# Altium PCB HAB-Communications-Board.PcbDoc (part 2 of 2)
Units mil, origin at the board's own origin, x right, y up, seen from the top; angles counter-clockwise.
Board outline 3937.01 x 3937.01 mil, 4 copper layers (Top Layer, Layer 1, Layer 2, Bottom Layer), stack 60.708 mil thick; 68 components, 59 nets, 326 pads, 208 vias.
Unrouted connection lines stored in the file: 48.
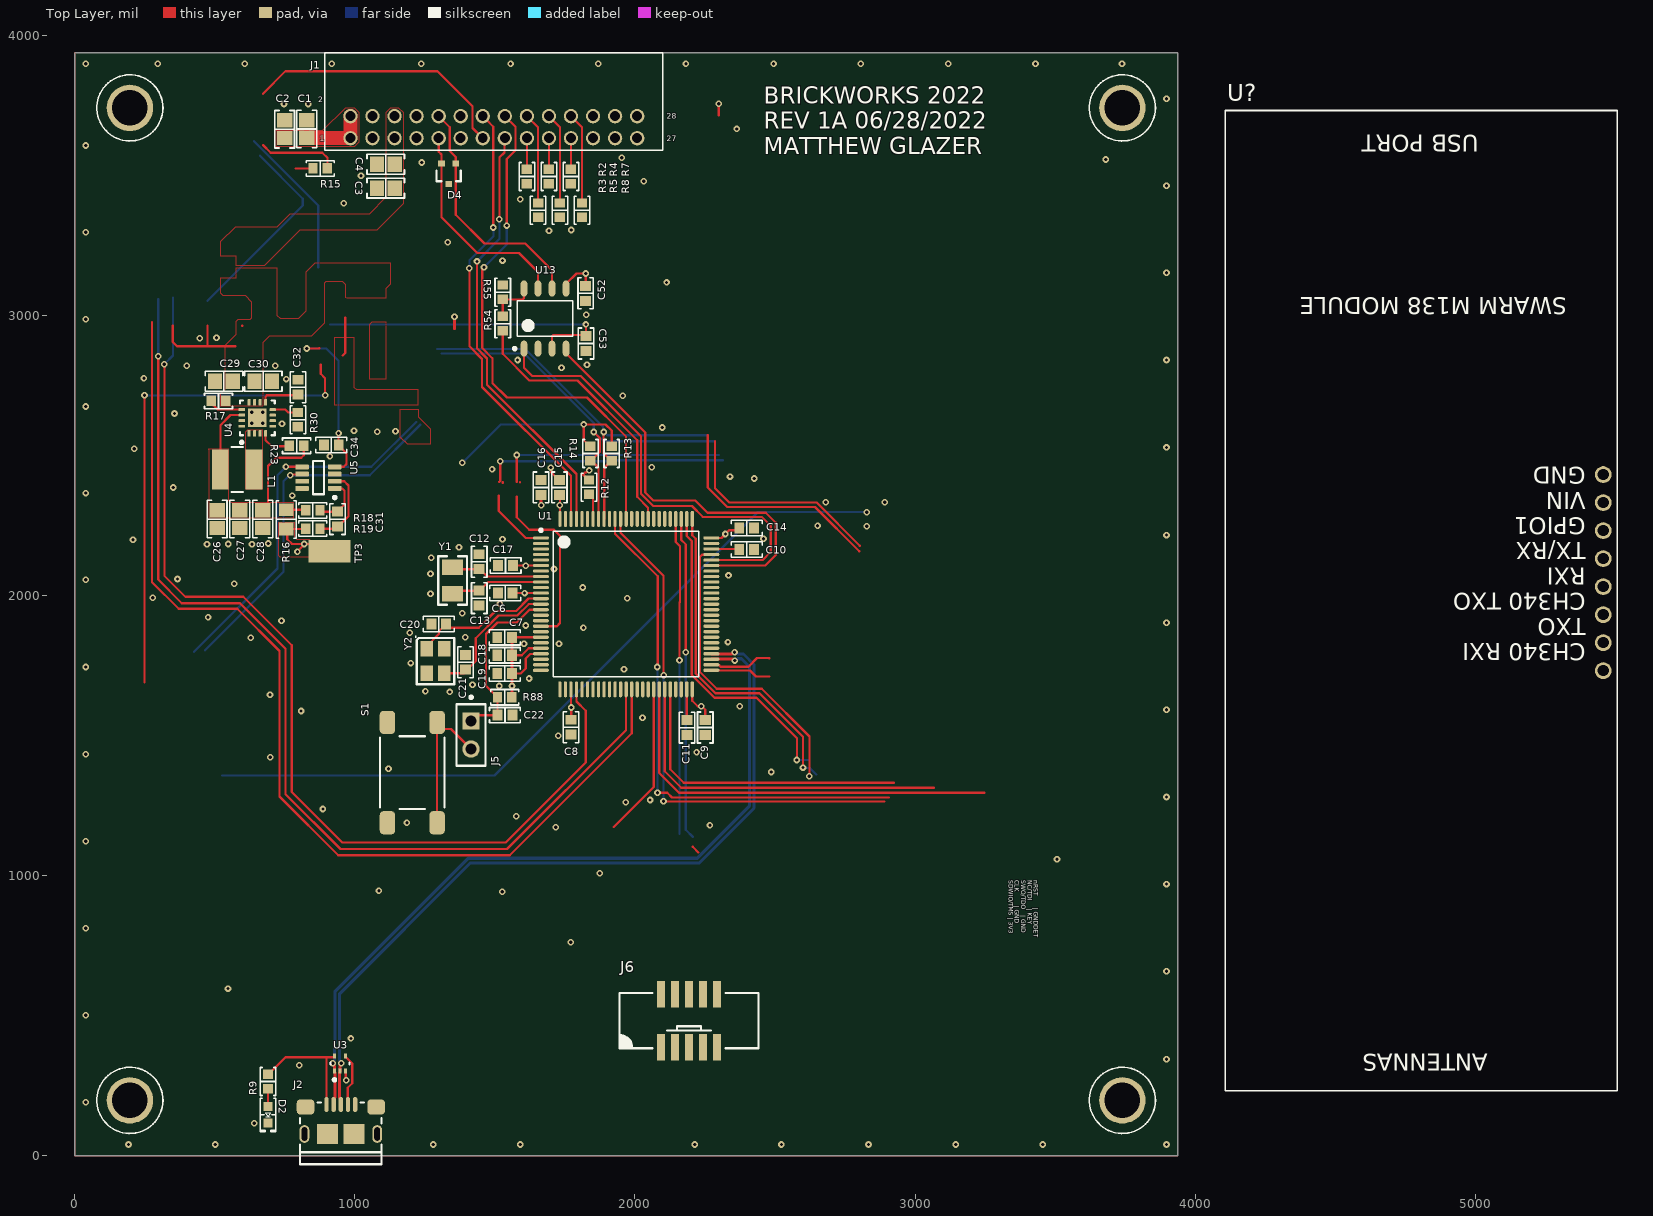
[diagram p0: Top Layer view]

## Via types
v1: diameter 23.62, hole 11.81, Top Layer to Bottom Layer, 208 vias

## Nets (pads, with @x,y where several pads share a name; then routed paths per layer and width w, separated by ;. In a path a pad name is that pad's centre, name@x,y a point inside that pad or via, vN(x,y) a via of type N, cw(c..) or ccw(c..) an arc to the next point about the centre after c; other vN are vias at no path point) (continued)
GND: (continued)
  other v1: 192,39.37 502,39.37 1280,39.37 1591,39.37 2213,39.37 2523,39.37 2834,39.37 3145,39.37 3456,39.37 3897.64,39.37 641,115 39.37,190 801,322 3897.64,344 986,418 39.37,501 547,596 3897.64,658 39.37,811 1526,942 1086,945 3897.64,969 1874,1008 3507,1058 39.37,1122 1717,1172 2267.75,1179.33 1186,1188 1576,1211 886,1237 1967,1261 2054,1269 3897.64,1280 2487,1369 1120,1381 698,1422 39.37,1433 2220,1440 1726,1499 2027,1563 808,1587 3897.64,1591 2374,1604 697,1645 1339,1655 1252,1657 1516,1676 1420,1681 1622,1703 1961,1736 39.37,1744 1200,1758 1604,1827 1729,1827 2332,1833 628,1848 1394,1850 1196,1866 1816,1884 1610,1892 3897.64,1902 738,1909 476,1922 1384,1936 1518,1970 1973,1990 279,1991 1270,2006 1814,2028 570,2041 39.37,2055 367,2058 2334,2071 1270,2077 1711,2094 1273,2134 1372,2172 472,2182 633,2182 548,2183 691,2185 208,2198 1527,2200 2459,2202 3897.64,2215 2828,2247 2652,2248 2681,2332.19 2892,2332.19 777,2356 39.37,2365 352,2385 1490,2450 2060,2457 911,2496 212,2523 3897.64,2528 1080,2584 1145,2586 997,2587 2097,2599 740,2612 632.2,2613.76 671.57,2613.76 356,2649 632.2,2653.13 671.57,2653.13 39.37,2674 1956,2712 755,2772 247,2775 1738,2812 716,2819 400,2820 1829,2823 1581,2840 3897.64,2840 446,2918 506,2919 39.37,2985 1826,3002 2113,3117 3897.64,3151 1527,3195 1332,3260 39.37,3296 1693,3301 1773,3304 960,3400 1590,3414 3897.64,3462 2031,3478 1022,3498 1239,3545 3681,3556 1953,3562 39.37,3606 2363,3665 747,3754 834,3754 3897.64,3773 39.37,3897.64 296,3897.64 607,3897.64 918,3897.64 1237,3897.64 1556,3897.64 1869,3897.64 2182,3897.64 2495,3897.64 2806,3897.64 3119,3897.64 3430,3897.64 3739,3897.64
NetC10_2: C10.2 U1.73 | length 110.9
  Top Layer w8: U1.73 2381.65,2165.35 C10.2@2383,2164
NetC11_2: C11.2 U1.49 | length 110.6
  Top Layer w8: U1.49 2185.04,1555.11 C11.2
NetC12_2: C12.2 U1.8 Y1.1 | length 329.2
  Top Layer w8: Y1.1 1355.94,2093.43 C12.2 1445.97,2093.43 1472.46,2066.93 U1.8
NetC13_2: C13.2 U1.9 Y1.2 | length 332.5
  Top Layer w8: Y1.2 1359.77,2016.57 C13.2 1445.97,2016.57 1476.64,2047.24 U1.9
NetC20_2: C20.2 U1.12 Y2.1 | length 505.5
  Top Layer w8: Y2.1 1256.35,1818.35 1300,1862 1300,1871.85 C20.2 1340.15,1884 1442,1884 1502,1944 1576,1944 1620.19,1988.19 U1.12
NetC21_2: C21.2 U1.13 Y2.3 | length 495.2
  Top Layer w8: Y2.3 1388.98,1721.98 1432,1765 1432,1847 1513,1928 1580,1928 1620.5,1968.5 U1.13
NetC22_2: C22.2 J5.1 R88.2 | length 642.6
  Top Layer w8: J5.1 1436,1572 C22.2 ; C22.2 R88.2 1468,1677.41 1468,1862 1509,1903 1578,1903 1623.82,1948.82 1664.37,1948.82
NetC26_2: C26.2 C27.2 C28.2 L1.2 R16.1 R18.2 R23.2 U4.14 | length 622.6
  Top Layer w8: L1.2@518,2475 520,2477 520,2607 556.29,2643.29 U4.14 ; C28.2@690,2312 690,2462 719,2491 809,2491 817.59,2499.59 R23.2 ; R16.1 821.96,2305.45 R18.2
NetC31_1: C31.1 R19.1 U5.2 | length 284.6
  Top Layer w8: R19.1 930.57,2238 C31.1 939.97,2245.43 977,2282.46 977,2392 961.8,2407.2 U5.2
NetC31_2: C31.2 R18.1 U5.1 | length 188.7
  Top Layer w8: R18.1 880.02,2298.57 C31.2 939.97,2298.57 953.69,2312.29 953.69,2314.26 963,2323.57 963,2373 955,2381 928.69,2381 U5.1
NetC32_2: C32.2 U4.9 | length 147.3
  Top Layer w8: U4.9 681,2688.98 681,2709.31 685.69,2714 804,2714 C32.2@805,2715
NetD2_1: D2.1 R9.1 | length 64.3
  Top Layer w8: D2.1 R9.1
NetD4_1: D4.1 J1.10 U13.6 | length 868
  Top Layer w8: J1.10 1339,3670.84 1339,3586 1360.59,3564.41 D4.1 1360.59,3358.41 1463,3256 1608,3256 1704,3160 U13.6
NetD4_2: D4.2 J1.9 U13.7 | length 770.8
  Top Layer w8: J1.9 1299.21,3583.79 1309.41,3573.59 D4.2 1309.41,3349.59 1437,3222 1586,3222 1654,3154 U13.7
NetJ1_13: J1.13 R15.1 | length 1251.1
  Top Layer w8: 672,3608 700,3580 884,3580 902,3562 902,3525 R15.1@900,3523 ; 672,3791 752,3871 1295,3871 1420,3746 1420,3668.58 J1.13
NetJ1_14: J1.14 U1.98 | length 1636.4
  Top Layer w8: v1(1409,3168) 1409,2889 1454,2844 1454,2744 1771.65,2426.35 U1.98 ; J1.14@1468,3712 1468,3699.32 1494.19,3673.13 v1(1494.19,3313)
  Bottom Layer w8: v1(1409,3168) 1409,3196 1495,3282 1495,3312.19 v1(1494.19,3313)
NetJ1_15: J1.15 U1.97 | length 1552.6
  Top Layer w8: v1(1436,3192) 1436,2881.8 1472,2845.8 1472,2752 1791,2433 1791,2272.98 U1.97 ; v1(1516,3343) 1516,3563 1534,3581 1534,3636 J1.15@1535,3637
  Bottom Layer w8: v1(1436,3192) 1516,3272 v1(1516,3343)
NetJ1_16: J1.16 U1.88 | length 1882.9
  Top Layer w8: v1@1462,3171 1462,3169.29 1455,3162.29 1455,2882.6 1491,2846.6 1491,2758 1543,2706 1829,2706 1968.5,2566.5 U1.88 ; J1.16 1574,3672.06 1574,3590 1542,3558 v1(1542,3320)
  Bottom Layer w8: v1(1461,3171) 1542,3252 v1@1542,3319
NetJ1_17: J1.17 R2.1 | length 111.3
  Top Layer w8: R2.1 J1.17
NetJ1_18: J1.18 R3.1 | length 328.4
  Top Layer w8: J1.18 1654,3670.8 1654,3401.59 R3.1@1652,3399.59
NetJ1_19: J1.19 R4.1 | length 111.3
  Top Layer w8: J1.19 1692.91,3520.68 R4.1
NetJ1_20: J1.20 R5.1 | length 327.6
  Top Layer w8: J1.20 1732,3671.54 R5.1 R5.1@1733,3399.59
NetJ1_21: J1.21 R7.1 | length 111.3
  Top Layer w8: R7.1 J1.21
NetJ1_22: J1.22 R8.1 | length 328.6
  Top Layer w8: J1.22 1811,3671.28 1811,3402.59 R8.1@1814,3399.59
NetJ2_1: J2.1 R9.2 U3.5 | length 434.9
  Top Layer w8: R9.2 691.97,290 752.68,350.72 899,350.72 ; J2.1 899,182.27 899,350.72 ; U3.5 927.32,352.62 925.41,350.72 899,350.72
NetJ2_4: J2.4 U3.4 | length 190.3
  Top Layer w8: U3.4 966.68,352.62 990.81,328.5 990.81,257.81 975,242 975,182.68 J2.4
NetJ5_2: J5.2 S1.3 S1.4 | length 518.8
  Top Layer w8: S1.3 S1.4@1293.58,1545.39 ; S1.4 S1.4@1293.58,1545.39 ; J5.2 1343.43,1522.57 1316.4,1522.57 S1.4@1293.58,1545.39
NetJ6_6: J6.6 U1.90 | length 1873.7
  Top Layer w8: U1.90 1929.13,2219.87 2081,2068 2081,1745 v1(2080,1744) ; v1(2080.59,1295) 2115,1295 2132,1278 2906,1278
  Bottom Layer w8: v1(2080,1744) 2080.3,1743.7 2080.3,1295.3 v1(2080.59,1295)
NetJ6_7: J6.7 U1.77 | length 1151.1
  Top Layer w8: U1.77 2185.04,2211.96 2203,2194 2203,1715.17 2284.17,1634 2434,1634 2578.19,1489.81 v1(2578.19,1412)
  Bottom Layer w8: v1(2578.19,1412) 2618,1412
NetJ6_8: J6.8 U1.89 | length 1860.2
  Top Layer w8: U1.89 1948.82,2223.18 2102,2070 2102,1715.81 v1(2102.81,1715) ; v1(2102,1265) 2103,1264 2890,1264
  Bottom Layer w8: v1(2102,1265) 2102.41,1265.41 2102.41,1714.59 v1(2102.81,1715)
NetJ6_9: J6.9 U1.76 | length 1200.5
  Top Layer w8: U1.76 2204.72,2214.28 2217,2202 2217,1720.97 2287.97,1650 2445,1650 2600,1495 v1(2600,1385)
  Bottom Layer w8: v1(2600,1385) 2601.36,1383.64 2623.81,1383.64 2647,1360.46
NetJ6_10: J6.10 U1.72 | length 1085.2
  Top Layer w8: U1.72 2248.97,2145.67 2248.3,2145 2239,2145 2231,2137 2231,1726.77 2291.77,1666 2453,1666 2622.81,1496.19 v1(2622.81,1353.81)
NetL1_1: L1.1 U4.1 U4.2 U4.3
NetR12_1: R12.1 U1.94 | length 96.8
  Top Layer w8: R12.1@1835,2360.41 R12.1 1836.97,2360.41 1850,2347.38 U1.94@1850,2271
NetR13_1: R13.1 U1.92 U5.5 | length 3644.6
  Top Layer w8: v1(754,2459) 754.31,2458.69 810.31,2458.69 U5.5@812,2457 ; v1(1889,2583) 1888,2582 1888,2507.44 1915.03,2480.41 R13.1 ; U1.92@1890,2272 1890,2456.38 1891,2456.38 1914.62,2480 R13.1@1915.03,2480 ; 2260,2571.81 2260,2385 2330,2315 2643,2315 2800.68,2157.32
  Bottom Layer w8: 426,1798 724,2096 724,2429 v1(754,2459) 1059,2459 1219,2619 ; 1293,2879 1608.8,2879 1886.01,2601.79 1886.01,2584.99 v1@1888,2583 ; v1@1890,2579 1894.31,2579 1901.5,2571.81 2260,2571.81
NetR14_1: R14.1 U1.93 U5.6 | length 3560.4
  Top Layer w8: v1(769,2429) 770.9,2430.9 801.9,2430.9 U5.6@803,2432 ; R14.1 R14.1@1842.97,2480.41 ; R14.1@1845,2482.44 1874,2511.44 1874,2561.54 1853,2582.54 v1(1853,2583) ; R14.1@1845.97,2480.41 1870,2456.38 1870,2423.16 1870.08,2423.08 U1.93 ; 2286,2550 2286,2382 2337,2331 2649,2331 2803,2177
  Bottom Layer w8: 465,1804 745,2084 745,2407 767,2429 1053,2429 1234,2610 ; 1309,2863 1605,2863 1853,2615 v1(1853,2583) ; v1@1856,2582.54 1888.54,2550 2286,2550
NetR15_2: R15.2 | length 62.4
  Top Layer w8: 788,3524 R15.2
NetR17_1: R17.1 U4.13 | length 127.9
  Top Layer w8: R17.1@485,2688.44 510.44,2663 559.7,2663 ; R17.1@486,2693.44 R17.1@486,2699 ; 559.73,2662.98 U4.13
NetR23_1: R23.1 U4.4 | length 126.3
  Top Layer w8: U4.4 681.41,2553.59 703,2532 R23.1@774,2532
NetR30_2: R30.2 U4.8 | length 103.1
  Top Layer w8: U4.8 752.02,2662.98 762,2653 R30.2@806,2653
NetR54_1: R54.1 R55.2 U13.8 | length 172.9
  Top Layer w8: R54.1 R55.2 1599.31,3056.41 1604,3061.1 U13.8
NetR54_2: R54.2 U1.84 | length 988.9
  Top Layer w8: R54.2 1528,2862 1623,2767 1794.62,2767 2008,2553.62 2008,2351.55 2046.51,2313.04 2046.51,2271.49 U1.84@2047,2271
NetU1_38: U1.38 | length 3695.1
  Top Layer w8: v1(298,2853) 298,2056 382,1972 590,1972 752,1810 752,1291 949,1094 1543,1094 1968.5,1519.5 U1.38
  Bottom Layer w8: v1(298,2853) 298,3057
NetU1_39: U1.39 | length 3685.6
  Top Layer w8: 276.19,2975.19 276.19,2046.81 371,1952 580,1952 731,1801 731,1282 941,1072 1553,1072 1988.19,1507.19 U1.39
NetU1_43: U1.43 | length 550.6
  Top Layer w8: 1924,1173 2066.93,1315.93 U1.43
NetU1_44: U1.44 | length 1489.5
  Top Layer w8: U1.44 2086.61,1365.39 2157,1295 3248,1295
NetU1_45: U1.45 | length 1277.7
  Top Layer w8: U1.45 2106.3,1371.7 2165,1313 3067,1313
NetU1_46: U1.46 | length 1104.3
  Top Layer w8: U1.46 2125.98,1379.02 2174,1331 2925,1331
NetU1_70: U1.70 U13.4 | length 1492
  Top Layer w8: U13.4 1754,2863.98 2037,2580.98 2037,2367 2066,2338 2216,2338 2259,2295 2467,2295 2503,2259 2503,2144 2465.3,2106.3 U1.70@2283.3,2106.3
NetU1_71: U1.71 U13.1 | length 1624.9
  Top Layer w8: U13.1 1604,2812 1633,2783 1807,2783 2022,2568 2022,2362.2 2065.2,2319 2203.49,2319 2242.49,2280 2453,2280 2485,2248 2485,2155 2456,2126 U1.71@2269,2126
NetU1_78: U1.78 U?.4 | length 1152.9
  Top Layer w8: U1.78 2165.35,2197.65 2181.19,2181.81 v1(2181.19,1797)
  Bottom Layer w8: v1(2181.19,1797) 2181.19,1162.81 2207,1137
NetU1_79: U1.79 U?.2 | length 1159
  Top Layer w8: U1.79 2145.67,2190.33 2160.89,2175.11 2160.89,1975.42 2159.38,1973.91 2159.38,1768.38 v1(2159,1768) ; 2206,1102 2226,1082
  Bottom Layer w8: 2159,1149 v1(2159,1768)
USB_HEADER_N: J2.2 U1.53 U3.1 | length 2809.4
  Top Layer w10.91: v1(921.38,328.88) 921.38,325.44 926.86,319.96 926.86,302.88 U3.1 ; J2.2 924.41,202.1 928.75,206.44 928.75,237.16 928.7,237.2 928.7,295.62 U3.1@928.55,295.78 ; U1.53 2295.52,1771.65 2296.91,1773.04 2319.64,1773.04 2319.95,1773.35 2346.21,1773.35 2352.56,1767 v1(2356,1767)
  Bottom Layer w10.91: v1(921.38,328.88) 921.38,332.32 927.69,338.63 927.69,400.84 928.7,401.86 928.7,584.94 1405.07,1061.31 2222.63,1061.31 2408.4,1247.08 2408.4,1745.52 2380.44,1773.48 2365.92,1773.48 2359.44,1767 v1(2356,1767)
USB_HEADER_P: J2.3 U1.54 U3.2 | length 2836.5
  Top Layer w10.91: U3.2@945.77,295.78 945.61,295.62 945.61,244.21 945.66,244.16 945.66,206.44 950,202.1 J2.3 ; U3.2 947.45,302.88 947.45,322.01 951,325.56 v1(951,329) ; U1.54 2295.52,1791.34 2296.91,1789.95 2312.64,1789.95 2312.95,1790.26 2345.89,1790.26 2352.25,1796.62 v1(2355.69,1796.62)
  Bottom Layer w10.91: v1(951,329) 951,332.44 944.6,338.85 944.6,393.84 945.61,394.85 945.61,577.93 1412.08,1044.4 2229.63,1044.4 2425.31,1240.07 2425.31,1752.53 2387.44,1790.39 2365.36,1790.39 2359.13,1796.62 v1(2355.69,1796.62)
pads on no net: J1.25 J1.26 J1.27 J1.28 J6.4 U1.1 U1.2 U1.3 U1.4 U1.5 U1.7 U1.14 U1.15 U1.16 U1.17 U1.18 U1.23 U1.24 U1.25 U1.26 U1.29 U1.30 U1.31 U1.32 U1.33 U1.34 U1.35 U1.36 U1.37 U1.40 U1.41 U1.42 U1.47 U1.48 U1.51 U1.52 U1.55 U1.56 U1.57 U1.58 U1.59 U1.60 U1.61 U1.62 U1.63 U1.64 U1.65 U1.66 U1.67 U1.68 U1.69 U1.80 U1.81 U1.82 U1.83 U1.85 U1.86 U1.87 U1.91 U1.95 U1.96 U4.17@651.88,2633.45 U?.1 U?.3 U?.5 U?.6 U?.MH1 U?.MH2 U?.MH3 U?.MH4
copper on no net: | length 12966.5
  Top Layer w8: 249,1689 v1@249,2713 ; v1(320,2825) 320,2070 395,1995 602,1995 775,1822 775,1298 956,1117 1538,1117 1824,1403 1824,1588 1791.34,1620.66 1791.34,1664.37 1791.34,1668.66 1791,1669 ; 350,2962.41 350,2904 365,2889 573,2889 ; 474,2890 474,2962.41 ; 597.59,2962 598,2962.41 ; 878,2823 878,2790.68 893.7,2774.98 893.7,2774 893.85,2773.85 893.85,2714.15 v1(894,2714) ; 957,2856 966,2865 966,2992 ; 1514,2355 1514,2301 1610.28,2204.72 1664.37,2204.72 ; 1515,2404.59 1519,2408.59 1519,2478 v1@1517,2480 ; 1528,2402 1528,2404.59 ; 1577,2404.59 1578,2405.59 v1(1578,2501) v1@1578,2504 ; 1578,2352 1578,2279 1623,2234 1711,2234 1732.81,2212.19 1732.81,1900.81 1721.76,1889.76 1664.37,1889.76 ; 1590,2404 1590,2404.59 ; 2272.64,1732.28 2273.37,1731.55 2299.65,1731.55 2300.01,1731.19 2410.81,1731.19 2432,1710 2479.41,1710 ; 2272.64,1751.97 2273.37,1751.24 2299.76,1751.24 2305.81,1745.19 2405.19,1745.19 2436,1776 2478.41,1776 2479.41,1775 ; v1(2426,2417.19) v1@2428.99,2420.18
  Top Layer w10: 1356,2951.57 v1(1356,2994) ; 2299,3714.59 v1(2299,3755)
  Bottom Layer w8: v1(249,2714) 249,2713 249.5,2713.5 893.5,2713.5 v1(894,2714) ; v1(320,2825) 351,2856 351,3063 ; 474,3052 814,3392 814,3416 661,3569 ; 526,1357 1499,1357 2439,2297 v1(2828,2297) ; 640,3621 869,3392 869,3171 ; v1(1519,2479) 1918.61,2479 1921.42,2481.81 2313.81,2481.81 ; v1(1578,2501) 2300,2501 ; v1@2423.01,2420.18 v1(2426,2417.19)
  other v1: 2339.21,2423.79

## Polygon pours and split planes (outlines as drawn)
GND on Bottom Layer "Bot Layer- GND" (solid, remove dead copper, shelved, pour order 31): 0,0 3937.01,0 3937.01,3937.01 0,3937.01
GND on Top Layer "Top Layer-GND" (solid, remove dead copper, shelved, pour order 30): 0,0 3937.01,0 3937.01,3937.01 0,3937.01
+5 on Top Layer "Top Layer-+5" (solid, remove dead copper, shelved, pour order 29): 722,3169 722,3000 733,2989 799,2989 826,3016 826,3155 859,3188 1126,3188 1126,3111 1110,3095 1110,3060 971,3060 968,3063 968,3108 956,3120 897,3120 891,3114 891,2972 844,2925 695,2925 671,2901 671,2677 669,2675 521,2675 521,2720 537,2736 537,2892 577,2932 577,2979 584,2986 627,2986 632,2991 632,3047 610,3069 530,3069 521,3078 521,3134 576,3134 576,3169
+5_Supply on Top Layer "Top Layer-+5_Supply" (solid, remove dead copper, shelved, pour order 28): 1172,3724.82 1172,3397 1079,3304 804,3304 676,3176 576,3176 576,3211 522,3211 522,3264 574,3316 723,3316 770,3363 1053,3363 1112,3422 1112,3724 1129,3741 1154.2,3741
no net on Top Layer "Top Layer-NetC62_2" (solid, remove dead copper, shelved, pour order 26): 1226,2680 1226,2733 1006,2733 998,2741 998,2919 926,2919 926,2912 926,2680
no net on Top Layer "Top Layer-NetL2_1" (solid, remove dead copper, shelved, pour order 23): 1112,2975 1061,2975 1052,2966 1052,2774 1112,2774
no net on Top Layer "Top Layer-+1.8" (solid, remove dead copper, shelved, pour order 21): 1226,2665 1226,2638 1270,2594 1270,2539 1188,2539 1163,2564 1163,2665
NetL1_1 on Top Layer "Top Layer-NetL1_1" (solid, remove dead copper, shelved, pour order 24): 669,2591 669,2378 610,2378 610,2583 618,2591
+3.3 on Top Layer "Top Layer-+3.3" (solid, remove dead copper, shelved, pour order 22): 783,2260 783,2210 793,2200 837,2200 851,2186 851,2143 844,2136 734,2136 728,2142 728,2260
+12_Supply on Top Layer "Top Layer-+12_Supply" (solid, remove dead copper, shelved, pour order 25): 1014,3618 998,3602 720,3602 720,3660 886,3660 967,3741 997,3741 1014,3724
NetC26_2 on Top Layer "Top Layer-NetC62_2" (solid, remove dead copper, shelved, pour order 27): 782,2276 782,2330 558,2330 550,2338 550,2521 477,2521 478,2520 478,2276
GND on Layer 2 (split plane): 3916.91,20.1 20.1,20.1 20.1,3916.91 3916.91,3916.91
GND on Layer 1 (split plane): 3916.91,20.1 20.1,20.1 20.1,3916.91 3916.91,3916.91

## Other copper
Top Layer:
  pour cut-out: 1694,2109 1724,2109 1724,2116 1694,2116
  pour cut-out: 1693,2007 1723,2007 1723,2014 1693,2014
  pour cut-out: 1630,2042 1630,2012 1637,2012 1637,2042
  pour cut-out: 291,2880 353,2880 353,2887 291,2887
  pour cut-out: 1797,2374 1817,2374 1817,2381 1797,2381
  pour cut-out: 1754,2459 1826,2459 1826,2466 1754,2466
  pour cut-out: 1472,3064 1502,3064 1502,3071 1472,3071
  pour cut-out: 2220,2321 2220,2291 2258,2291 2258,2321
  pour cut-out: 2431,1702 2431,1672 2453,1672 2453,1702
  pour cut-out: 1611,1753 1611,1723 1633,1723 1633,1753
  pour cut-out: 1541,1983 1541,1953 1548,1953 1548,1983
  pour cut-out: 788,2557 788,2511 796,2511 796,2557
  pour cut-out: 556,2525 604,2525 604,2354 556,2354
  pour cut-out: 1001,2922 1049,2922 1049,2751 1001,2751
Bottom Layer:
  pour cut-out: 1954.16,2006.13 1954.16,1976.13 1992.16,1976.13 1992.16,2006.13
  pour cut-out: 2441.16,2339.13 2441.16,2309.13 2479.16,2309.13 2479.16,2339.13
  pour cut-out: 1773,1716 1773,1648 1811,1686 1811,1716

## Silkscreen, mask and mechanical layers (free items; w line width, h text height)
Top Overlay:
  circle w5.91: c196.85,196.85 r118.11
  circle w5.91: c196.85,3740.16 r118.11
  circle w5.91: c3740.16,3740.16 r118.11
  circle w5.91: c3740.16,196.85 r118.11
  text "BRICKWORKS 2022 / REV 1A 06/28/2022 / MATTHEW GLAZER" at 2460,3575 h60
  text "nRST      | GNDDET / NC/TDI    | KEY / SWO/TDO   | GND / CLK       | GND / SDWIO/TMS | 3V3" at 3334,983 h15 r270
Mechanical 1:
  the board outline again, w10

## Text inside footprints (layer, text, board x,y; h text height)
J1: Top Overlay "28" at 2114.25,3700.63 h20.16; Top Overlay "27" at 2114.25,3620.63 h20.16; Top Overlay "2" at 869,3760 h20.16; Top Overlay "1" at 874.25,3620.63 h20.16
U?: Top Overlay "CH340 RXI / TXO / CH340 TXO / RXI / TX/RX / GPIO1 / VIN / GND" at 5394.5,2458.5 h60 r180; Top Overlay "SWARM M138 MODULE" at 5327,3063.5 h60 r180; Top Overlay "ANTENNAS" at 5043.85,363.5 h60 r180; Top Overlay "USB PORT" at 5012,3643.5 h60 r180